# Altium PCB Rover_PI_hat.PcbDoc
Units mm, origin at the board's own origin, x right, y up, seen from the top; angles counter-clockwise.
Board outline 65.26 x 25.88 mm, 2 copper layers (Top Layer, Bottom Layer), stack 1.554 mm thick; 7 components, 14 nets, 66 pads, 0 vias.
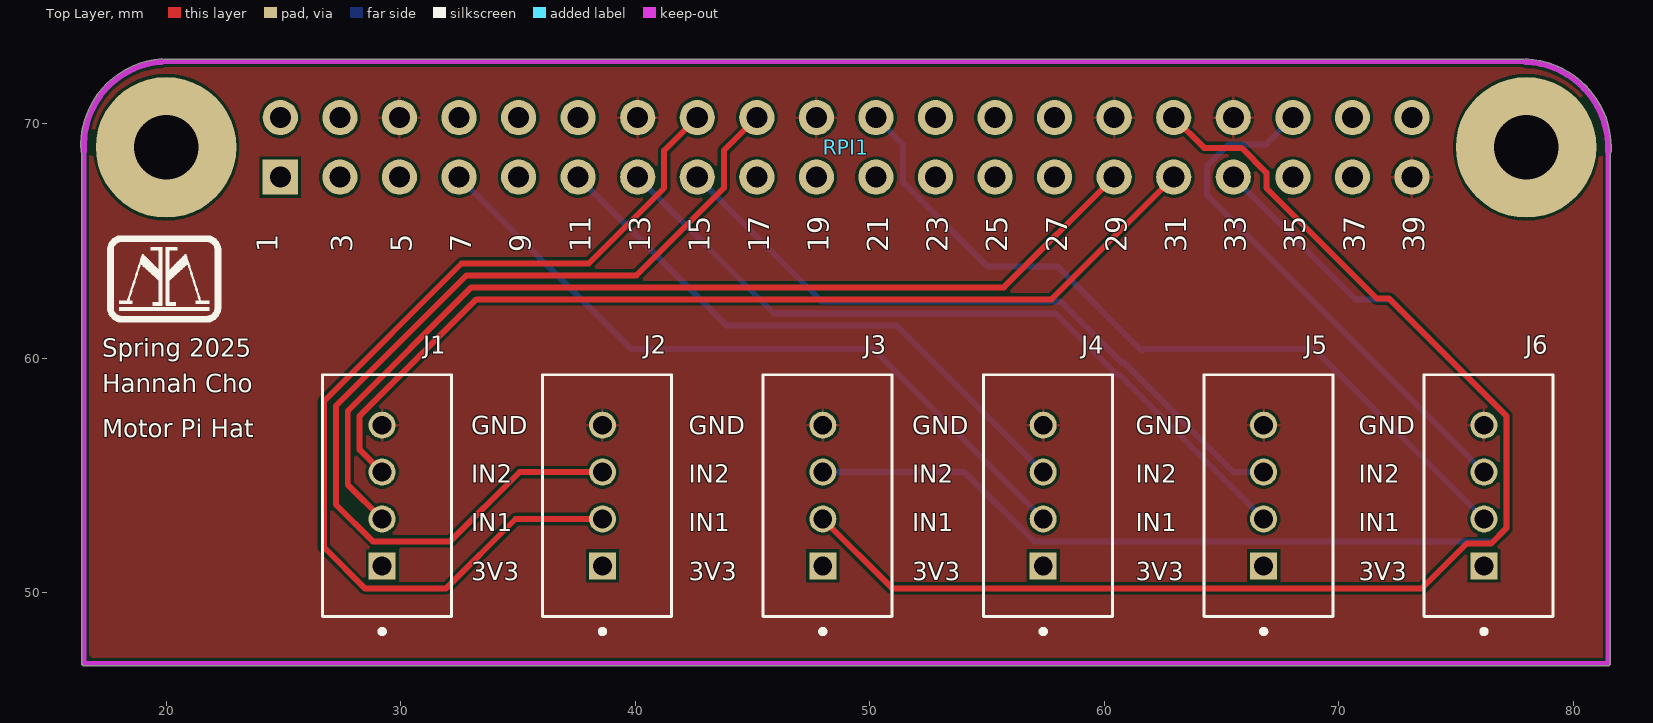
[diagram p0: Top Layer view]
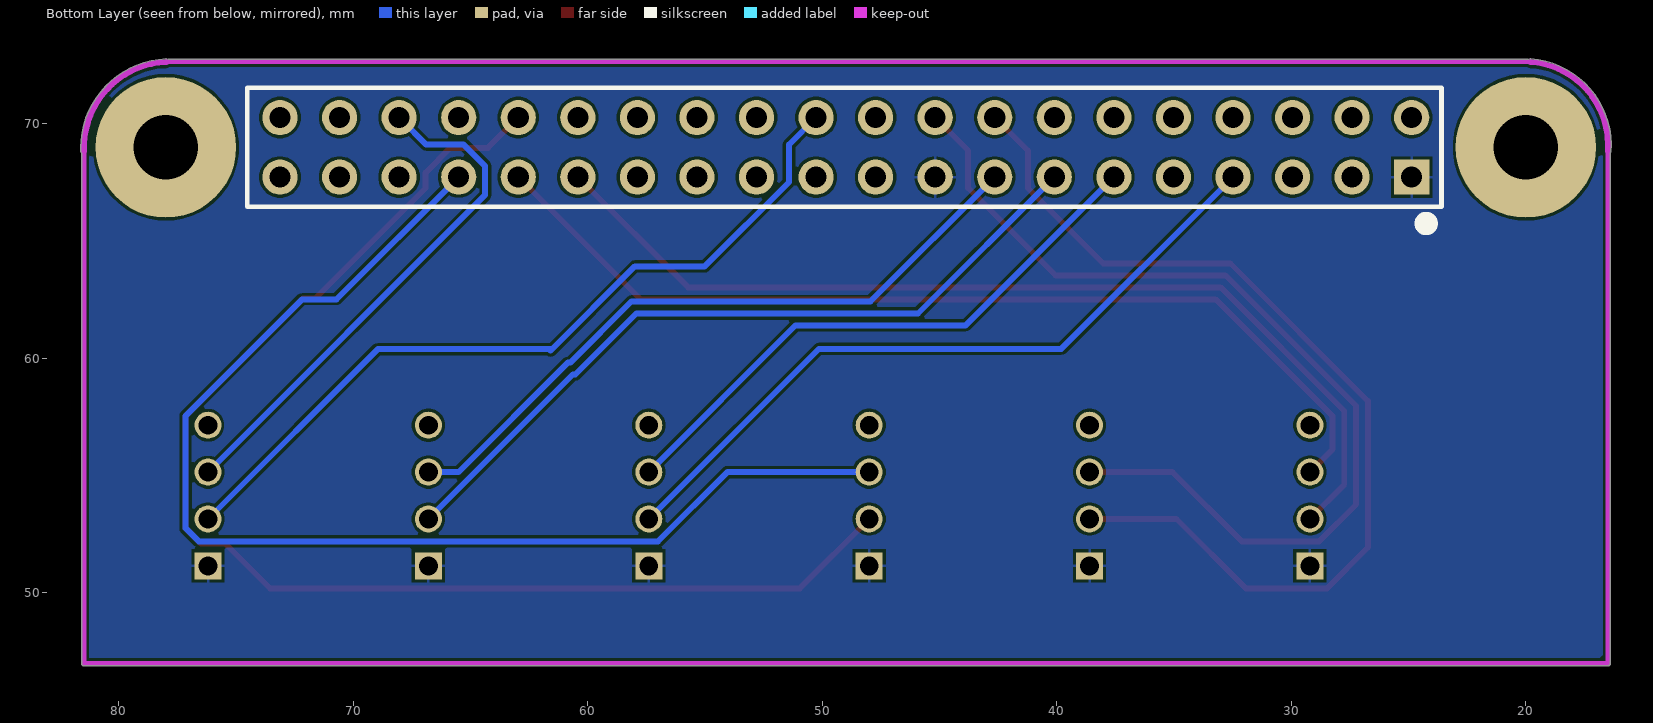
[diagram p1: Bottom Layer view, seen from below]

## Layer stack, top to bottom
Top Solder: solder mask 0.0203, Solder Resist, Dk 3.5
Top Layer: signal copper 0.0533
Dielectric 1: dielectric 1.4478, FR-4, Dk 4.6
Bottom Layer: signal copper 0.0533
Bottom Solder: solder mask 0.0203, Solder Resist, Dk 3.5

## Board outline
16.5,46.89 16.764,46.89 81.492,46.89 ccw(c81.492,46.99) 81.592,46.99 81.592,68.746 81.619,68.819 ccw(c77.825,68.977) 81.623,68.977 ccw(c77.825,68.977) 77.983,72.771 77.9,72.744 19.89,72.744 19.803,72.771 ccw(c20.066,69.078) 16.373,68.815 16.4,68.746 16.4,46.99 ccw(c16.5,46.99)

## Design rules (kind name [scope] priority, off if disabled: settings)
BoardOutlineClearance [All] p1: gap=0.2 ignorepadtopadclearanceinfootprint=FALSE
Clearance [All] p1: gap=0.127 ignorepadtopadclearanceinfootprint=FALSE except(0.25: Arc-Hole Track-Hole SMDPad-Hole THPad-Hole Via-Hole Fill-Hole Poly-Hole Region-Hole Text-Hole)
ComponentClearance [All] p1: gap=0.127 collisioncheckmode=3 verticalgap=0.127 showdistances=TRUE
DiffPairsRouting [All] p1: maxlimit=0.254 minlimit=0.127 mostfreqgap=0.127 toplayer_minwidth=0.127 toplayer_maxwidth=25.4 toplayer_prefwidth=0.127 bottomlayer_minwidth=0.127 bottomlayer_maxwidth=25.4 bottomlayer_prefwidth=0.127 maxuncoupledlength=12.7
Height [All] p1: minheight=0 maxheight=1816.048 prefheight=12.7
HoleSize [All] p1: absolutevalues=TRUE maxlimit=6.3 minlimit=0.3 maxpercent=80.000 minpercent=20.000
HoleToHoleClearance [All] p1: gap=0.25 allowstackedmicrovias=FALSE
MinimumAnnularRing [All] p1: minimumring=0.076
MinimumSolderMaskSliver [All] p1: minsoldermaskwidth=0
PlaneClearance [All] p1: clearance=0.127
PlaneConnect PlaneConnectPowerPads [InPadClass('PowerPads')] p1: planeconnectstyle=Direct reliefexpansion=0.508 reliefentries=4 reliefconductorwidth=0.254 reliefairgap=0.254
PlaneConnect [All] p2: pad.planeconnectstyle=Relief pad.reliefexpansion=0.3 pad.reliefentries=4 pad.reliefconductorwidth=0.127 pad.reliefairgap=0.127 via.planeconnectstyle=Direct via.reliefexpansion=0.3 via.reliefentries=4 via.reliefconductorwidth=0.127 via.reliefairgap=0.127
PolygonConnect PolygonConnectPowerPads [All vs (InPadClass('PowerPads'))] p1: connectstyle=Direct reliefconductorwidth=0.254 reliefentries=4 polygonreliefangle="90 Angle" airgapwidth=0.254
PolygonConnect [All] p2: thpad.connectstyle=Relief thpad.reliefconductorwidth=0.127 thpad.reliefentries=4 thpad.polygonreliefangle="90 Angle" thpad.airgapwidth=0.127 smdpad.connectstyle=Relief smdpad.reliefconductorwidth=0.127 smdpad.reliefentries=4 smdpad.polygonreliefangle="90 Angle" smdpad.airgapwidth=0.127 via.connectstyle=Direct via.reliefconductorwidth=0.127 via.reliefentries=4 via.polygonreliefangle="90 Angle" via.airgapwidth=0.127
RoutingVias [All] p1: holewidth=0.3 width=0.6 viastyle="Through Hole" minholewidth=0.3 minwidth=0.6 maxholewidth=0.6 maxwidth=6.6
SilkToSilkClearance [All] p1: silktosilkclearance=0
SilkToSolderMaskClearance [IsPad] p1: minsilkscreentomaskgap=0.127 clearancetoexposedcopper=TRUE
SolderMaskExpansion [All] p1: expansion=0.075 istentingtop=FALSE
Width [All] p1: maxlimit=25.4 minlimit=0.127 preferedwidth=0.127 minimp=50.000000 maximp=50.000000 favimp=50.000000
20 further rules are at their usual default settings.

## Components (designator, comment, footprint, x,y, rotation, side; value= is the part's Value field where it differs from the comment)
J1 "MOLEX HEADER 4POS" MOLEX_35362-0450 29.21,54.15 r90 top
J2 "MOLEX HEADER 4POS" MOLEX_35362-0450 38.608,54.15 r90 top
J3 "MOLEX HEADER 4POS" MOLEX_35362-0450 48.006,54.15 r90 top
J4 "MOLEX HEADER 4POS" MOLEX_35362-0450 57.404,54.15 r90 top
J5 "MOLEX HEADER 4POS" MOLEX_35362-0450 66.802,54.15 r90 top
J6 "MOLEX HEADER 4POS" MOLEX_35362-0450 76.2,54.15 r90 top
RPI1 "RPI GPIO Connector" RPI 49,69 r180 top

## Footprints (in the part's own frame and the unit in brackets; to place one, negate y for a bottom-side part, rotate by r counter-clockwise, add the part's x,y. Pads: shape width x height; smd on the part's side, far side on the other; paste and mask are expansions set on the pad)
MOLEX_35362-0450 [mm]
  rect 1.15x1.15 / inner round 1.15 / far side rect 1.15x1.15 hole 0.8: 01(-3,0)
  round 1.15 hole 0.8: 02(-1,0) 03(1,0) 04(3,0)
  silkscreen extent -5.9,-2.95 5.15,2.55
RPI [mm]
  rect 1.5x1.5 hole 0.9: 1(24.13,1.27)
  round 1.5 hole 0.9: 2(24.13,-1.27) 3(21.59,1.27) 4(21.59,-1.27) 5(19.05,1.27) 6(19.05,-1.27) 7(16.51,1.27) 8(16.51,-1.27) 9(13.97,1.27) 10(13.97,-1.27) 11(11.43,1.27) 12(11.43,-1.27) 13(8.89,1.27) 14(8.89,-1.27) 15(6.35,1.27) 16(6.35,-1.27) 17(3.81,1.27) 18(3.81,-1.27) 19(1.27,1.27) 20(1.27,-1.27) 21(-1.27,1.27) 22(-1.27,-1.27) 23(-3.81,1.27) 24(-3.81,-1.27) 25(-6.35,1.27) 26(-6.35,-1.27) 27(-8.89,1.27) 28(-8.89,-1.27) 29(-11.43,1.27) 30(-11.43,-1.27) 31(-13.97,1.27) 32(-13.97,-1.27) 33(-16.51,1.27) 34(-16.51,-1.27) 35(-19.05,1.27) 36(-19.05,-1.27) 37(-21.59,1.27) 38(-21.59,-1.27) 39(-24.13,1.27) 40(-24.13,-1.27)
  body extent -25.52,-2.63 25.53,2.38, height 8.5

## Part data
J1 J2 J3 J4 J5 J6: library part 35362-0450, "Connector Header Through Hole 4 position 0.079 (2.00mm)", Package=None, Availability="In Stock", Check_prices=https://www.snapeda.com/parts/35362-0450/Molex/view-part/?ref=eda, MF=Molex, MP=35362-0450, Price=None, SnapEDA_Link=https://www.snapeda.com/parts/35362-0450/Molex/view-part/?ref=snap
RPI1: library part "rpi connector", "GPIO Header for Raspberry Pi A+/B+/Pi 2/Pi 3 - 2x20", Manufacturer="SparkFun Electronics", Manufacturer Part Number=PRT-14017, Supplier Part Number 1=1568-1462-ND, Accessory Type=Connector, Category="Development Boards, Kits, Programmers", ComponentLink1Description=https://cdn.sparkfun.com/datasheets/Dev/RaspberryPi/12313.pdf, ComponentLink1URL=https://cdn.sparkfun.com/datasheets/Dev/RaspberryPi/12313.pdf, For Use With/Related Products="Raspberry Pi", Nils Minor=author, nilsminor@web.de=mail, Part Status=Active, Pricing 1="1=1.84 (EUR)", RoHS="RoHS Compliant", Stock 1=150, Supplier 1=Digi-Key

## Free pads (board coordinates)
  round 6 hole 2.75: ""(20,69) ""(78,69)

## Nets (pads, with @x,y where several pads share a name; then routed paths per layer and width w, separated by ;. In a path a pad name is that pad's centre, name@x,y a point inside that pad or via, vN(x,y) a via of type N, cw(c..) or ccw(c..) an arc to the next point about the centre after c; other vN are vias at no path point)
3V3: J1.01 J2.01 J3.01 J4.01 J5.01 J6.01 RPI1.1 RPI1.17
4: J4.02 RPI1.7 | length 31.1
  Bottom Layer w0.254: RPI1.7@33.02,67.945 32.897,67.822 32.897,67.323 39.813,60.407 50.147,60.407 J4.02
5: J1.02 RPI1.29 | length 42.2
  Top Layer w0.254: J1.02 27.746,54.614 27.746,57.756 33.016,63.027 55.727,63.027 60.325,67.625 RPI1.29@60.325,67.945
6: J1.03 RPI1.31 | length 41.9
  Top Layer w0.254: J1.03 28.254,56.106 28.254,57.546 33.227,62.519 57.759,62.519 62.865,67.625 RPI1.31@62.865,67.945
12: J3.02 RPI1.32 | length 56.3
  Top Layer w0.254: J3.02 50.962,50.194 73.555,50.194 75.467,52.106 76.508,52.106 77.156,52.754 77.156,57.546 72.159,62.543 71.638,62.543 66.919,67.262 66.919,67.92 65.863,68.976 64.264,68.976 RPI1.32 62.865,70.375 RPI1.32@62.865,70.485
13: J3.03 RPI1.33 | length 51.5
  Bottom Layer w0.254: J3.03 54.052,55.15 57.008,52.194 76.596,52.194 77.156,52.754 77.156,57.546 72.183,62.519 70.721,62.519 RPI1.33 65.405,67.835 RPI1.33@65.405,67.945
16: J6.03 RPI1.36 | length 22.6
  Bottom Layer w0.254: RPI1.36@67.945,70.485 67.945,70.165 66.895,69.115 65.296,69.115 64.379,68.198 64.379,66.971 J6.03
17: J4.03 RPI1.11 | length 25.3
  Bottom Layer w0.254: RPI1.11@37.465,67.945 37.465,67.835 RPI1.11 43.893,61.407 51.147,61.407 J4.03
22: J5.03 RPI1.15 | length 29.4
  Bottom Layer w0.254: RPI1.15 47.957,62.423 58.144,62.423 60.75,59.817 60.853,59.817 65.52,55.15 J5.03
23: J2.02 RPI1.16 | length 42.1
  Top Layer w0.254: J2.02 34.899,53.15 31.943,50.194 28.477,50.194 26.73,51.941 26.73,58.177 32.596,64.043 38.022,64.043 41.241,67.262 41.241,68.861 42.545,70.165 RPI1.16@42.545,70.485
24: J2.03 RPI1.18 | length 41.6
  Top Layer w0.254: J2.03 35.068,55.15 32.112,52.194 28.814,52.194 27.238,53.77 27.238,57.967 32.806,63.535 40.054,63.535 43.781,67.262 43.781,68.861 45.085,70.165 RPI1.18@45.085,70.485
25: J6.02 RPI1.22 | length 33.9
  Bottom Layer w0.254: RPI1.22 51.425,69.115 51.425,67.516 55.02,63.92 58,63.92 61.595,60.325 ; 61.595,60.39 68.96,60.39 76.01,53.34 J6.02@76.2,53.34
27: J5.02 RPI1.13 | length 32.7
  Bottom Layer w0.254: RPI1.13 45.925,61.915 57.934,61.915 60.539,59.309 60.643,59.309 J5.02
GND: J1.04 J2.04 J3.04 J4.04 J5.04 J6.04 RPI1.6 RPI1.14 RPI1.20 RPI1.30 RPI1.34 RPI1.39
pads on no net: RPI1.2 RPI1.3 RPI1.4 RPI1.5 RPI1.8 RPI1.9 RPI1.10 RPI1.12 RPI1.19 RPI1.21 RPI1.23 RPI1.24 RPI1.25 RPI1.26 RPI1.27 RPI1.28 RPI1.35 RPI1.37 RPI1.38 RPI1.40

## Polygon pours and split planes (outlines as drawn)
3V3 on Bottom Layer "3V3_L02_P007" (solid, pour order 7): 16.5,46.89 16.764,46.89 81.492,46.89 ccw(c81.492,46.99) 81.592,46.99 81.592,68.746 81.619,68.819 ccw(c77.825,68.977) 81.623,68.977 ccw(c77.825,68.977) 77.983,72.771 77.9,72.744 19.89,72.744 19.803,72.771 ccw(c20.066,69.078) 16.373,68.815 16.4,68.746 16.4,46.99 ccw(c16.5,46.99)
GND on Top Layer "GND_L01_P008" (solid, pour order 8): 16.5,46.89 16.764,46.89 81.492,46.89 ccw(c81.492,46.99) 81.592,46.99 81.592,68.746 81.619,68.819 ccw(c77.825,68.977) 81.623,68.977 ccw(c77.825,68.977) 77.983,72.771 77.9,72.744 19.89,72.744 19.803,72.771 ccw(c20.066,69.078) 16.373,68.815 16.4,68.746 16.4,46.99 ccw(c16.5,46.99)

## Keep-outs
Keep-Out Layer:
  lines w0.2: 16.5,68.824 16.5,46.99 ; 19.812,72.644 77.978,72.644 ; 80.645,46.99 81.492,46.99 ; 81.492,68.824 81.492,46.99 ; 16.5,46.99 16.764,46.99 ; 16.5,46.99 81.492,46.99 ; 16.764,46.99 16.764,46.99
  lines w0.254: 16.5,68.824 cw(c20.066,69.078) 19.812,72.644 ; 77.978,72.644 cw(c77.825,68.977) 81.492,68.824

## Silkscreen, mask and mechanical layers (free items; w line width, h text height)
Top Overlay:
  drawing of 4 lines, arcs and shapes, not listed
  text "1" at 24.765,64.52 h0.89 r90
  text "3" at 27.94,64.52 h0.89 r90
  text "5" at 30.48,64.52 h0.89 r90
  text "7" at 33.02,64.52 h0.89 r90
  text "9" at 35.56,64.52 h0.89 r90
  text "11" at 38.1,64.52 h0.89 r90
  text "13" at 40.64,64.52 h0.89 r90
  text "15" at 43.18,64.52 h0.89 r90
  text "17" at 45.72,64.52 h0.89 r90
  text "19" at 48.26,64.52 h0.89 r90
  text "21" at 50.8,64.52 h0.89 r90
  text "23" at 53.34,64.52 h0.89 r90
  text "25" at 55.88,64.52 h0.89 r90
  text "27" at 58.42,64.52 h0.89 r90
  text "29" at 60.96,64.52 h0.89 r90
  text "31" at 63.5,64.52 h0.89 r90
  text "33" at 66.04,64.52 h0.89 r90
  text "35" at 68.58,64.52 h0.89 r90
  text "37" at 71.12,64.52 h0.89 r90
  text "39" at 73.66,64.52 h0.89 r90
  text "Spring 2025" at 17.272,60.071 h0.76
  text "Hannah Cho" at 17.272,58.547 h0.76
  text "GND" at 33.02,56.769 h0.76
  text "GND" at 42.291,56.769 h0.76
  text "GND" at 51.816,56.769 h0.76
  text "GND" at 61.341,56.769 h0.76
  text "GND" at 70.866,56.769 h0.76
  text "Motor Pi Hat" at 17.272,56.642 h0.76
  text "IN2" at 33.02,54.695 h0.76
  text "IN2" at 42.291,54.695 h0.76
  text "IN2" at 51.816,54.695 h0.76
  text "IN2" at 61.341,54.695 h0.76
  text "IN2" at 70.866,54.695 h0.76
  text "IN1" at 33.02,52.62 h0.76
  text "IN1" at 42.291,52.62 h0.76
  text "IN1" at 51.816,52.62 h0.76
  text "IN1" at 61.341,52.62 h0.76
  text "IN1" at 70.866,52.62 h0.76
  text "3V3" at 33.02,50.546 h0.76
  text "3V3" at 42.291,50.546 h0.76
  text "3V3" at 51.816,50.546 h0.76
  text "3V3" at 61.341,50.546 h0.76
  text "3V3" at 70.866,50.546 h0.76
Bottom Overlay:
  circle w0.5: c24.25,65.75 r0.25
M2: Outline:
  lines w0.254: 16.5,46.99 16.5,69 cw(c20,69) 20,72.5 78,72.5 cw(c77.996,69.004) 81.492,69 81.492,46.99